# Altium PCB NexieControl rev.2.PcbDoc
Units mm, origin at the board's own origin, x right, y up, seen from the top; angles counter-clockwise.
Board outline 80 x 46 mm, 2 copper layers (Top Layer, Bottom Layer); 119 components, 85 nets, 408 pads, 129 vias.
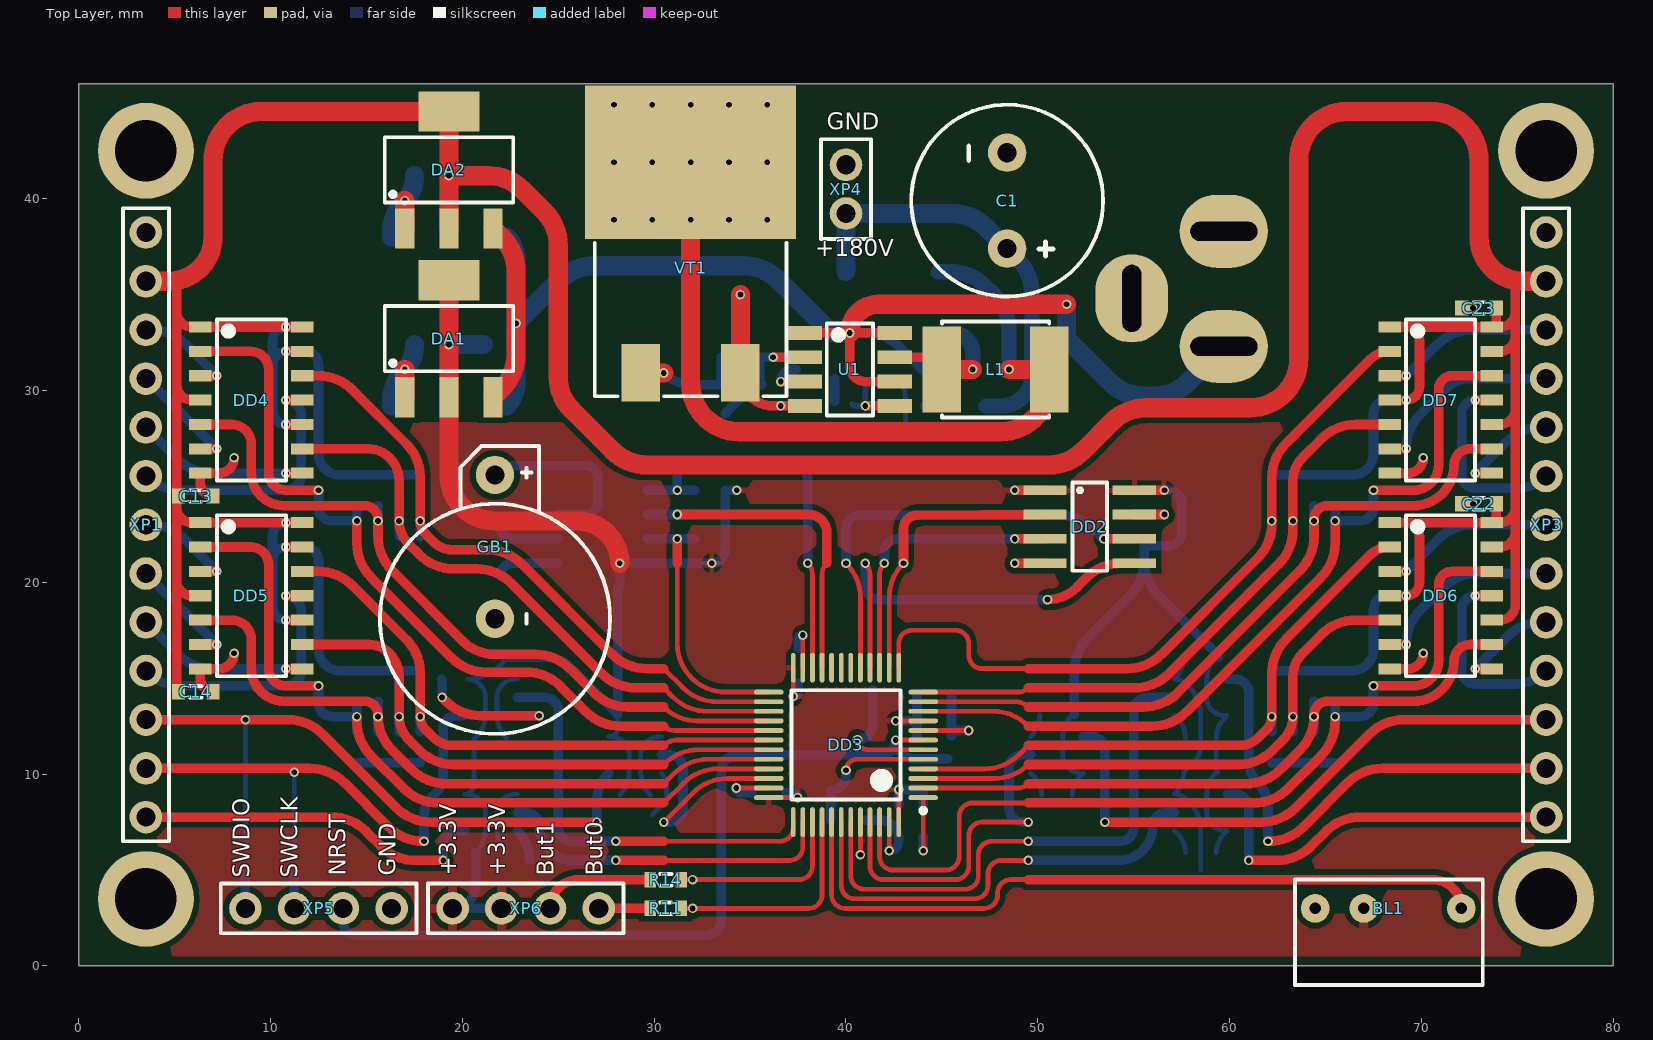
[diagram p0: Top Layer view]
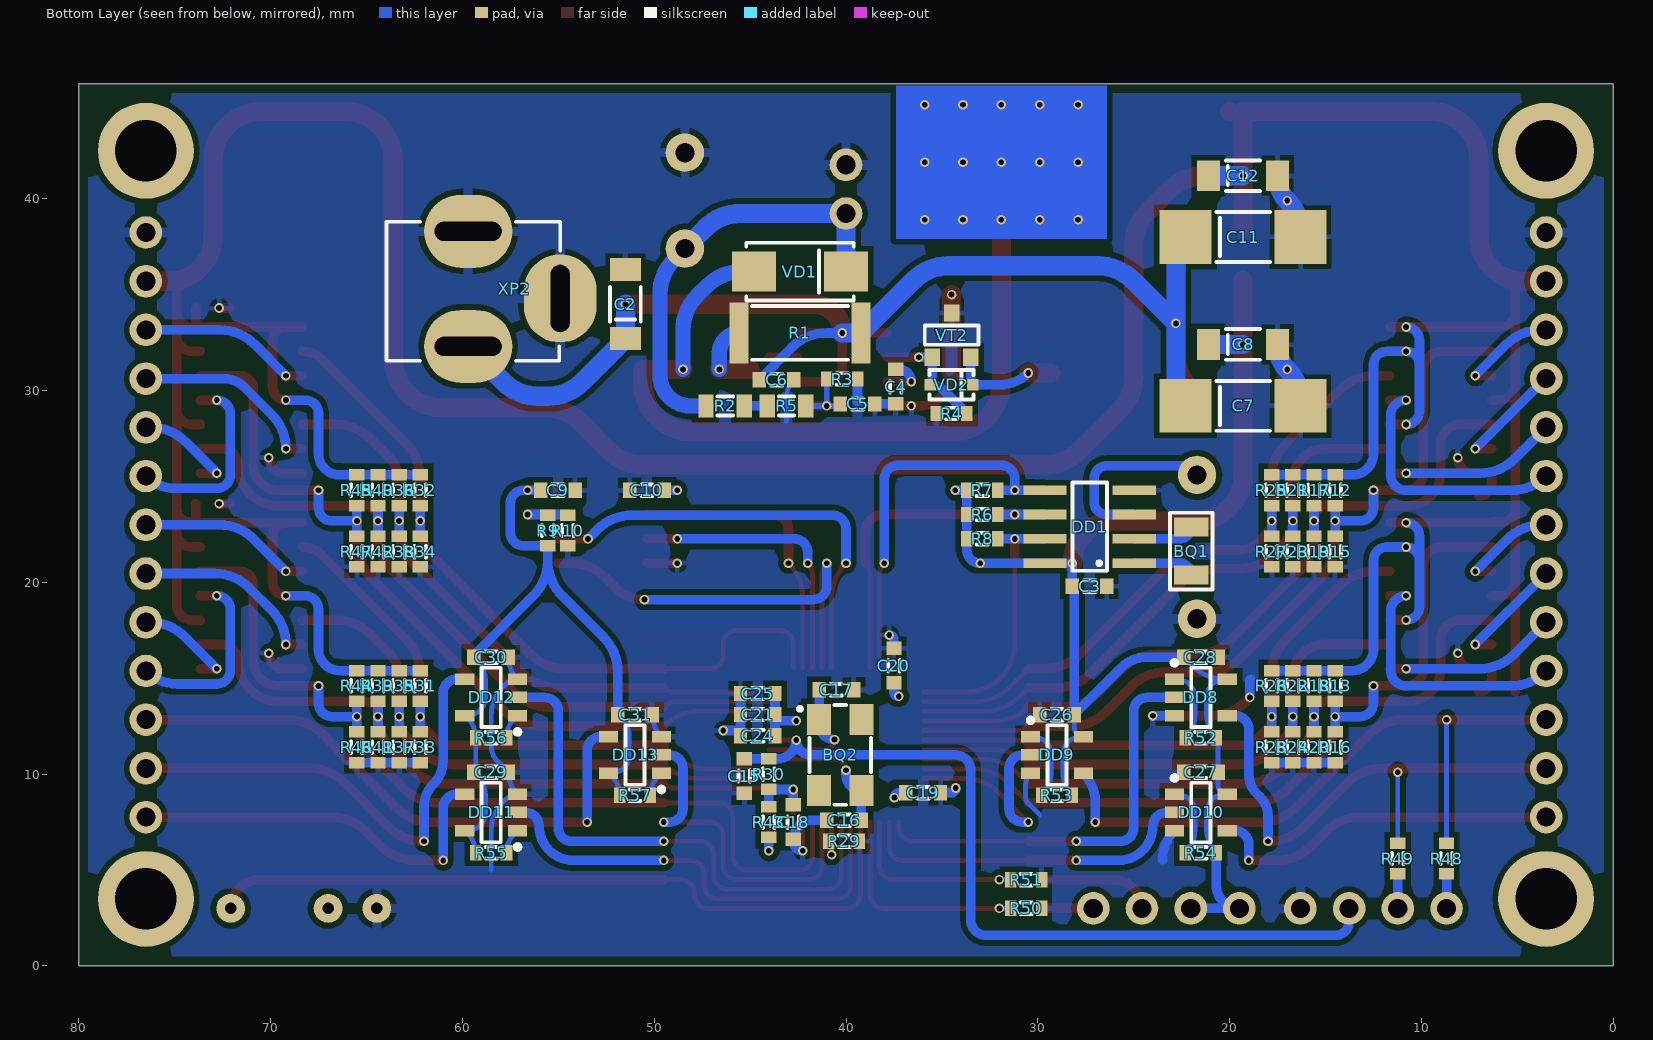
[diagram p1: Bottom Layer view, seen from below]

## Layer stack, top to bottom
Top Solder: solder mask 0.0102, Solder Resist, Dk 3.5
Top Layer: signal copper 0.0356
Dielectric 1: dielectric 0.32, FR-4, Dk 4.8
Bottom Layer: signal copper 0.0356
Bottom Solder: solder mask 0.0102, Solder Resist, Dk 3.5

## Board outline
0,0 0,46 80,46 80,0

## Design rules (kind name [scope] priority, off if disabled: settings)
Clearance Clearance_8 [InNamedPolygon('Bottom Layer-GND')] p1: gap=0.3 ignorepadtopadclearanceinfootprint=FALSE
Clearance Clearance_7 [InNamedPolygon('Bottom Layer-GND')] p2: gap=0.5 ignorepadtopadclearanceinfootprint=FALSE
Clearance Clearance_6 [InNamedPolygon('Bottom Layer-GND')] p3: gap=0.254 ignorepadtopadclearanceinfootprint=FALSE except(0: Arc-Hole Track-Hole SMDPad-Hole THPad-Hole Via-Hole Fill-Hole Poly-Hole Region-Hole Text-Hole)
Clearance Clearance_5 [InNamedPolygon('Bottom Layer-GND')] p4: gap=0.3 ignorepadtopadclearanceinfootprint=FALSE
Clearance Clearance_4 [InNamedPolygon('Bottom Layer-GND')] p5: gap=0.3 ignorepadtopadclearanceinfootprint=FALSE
Clearance Clearance_3 [InNamedPolygon('Bottom Layer-GND')] p6: gap=0 ignorepadtopadclearanceinfootprint=FALSE
Clearance Clearance_2 [InNamedPolygon('Bottom Layer-GND')] p7: gap=0.3 ignorepadtopadclearanceinfootprint=FALSE
Clearance Clearance_1 [InNamedPolygon('Bottom Layer-GND')] p8: gap=0.5 ignorepadtopadclearanceinfootprint=FALSE
Clearance [All] p9: gap=0 ignorepadtopadclearanceinfootprint=FALSE
ComponentClearance [All] p1: gap=0.25 collisioncheckmode=3 verticalgap=0.254 showdistances=FALSE
HoleSize [All] p1: absolutevalues=TRUE maxlimit=3.5 minlimit=0.3 maxpercent=80.000 minpercent=20.000
MinimumSolderMaskSliver [All] p1: minsoldermaskwidth=0.15
PlaneClearance [All] p1: clearance=0.5
PlaneConnect [All] p1: planeconnectstyle=Relief reliefexpansion=0.25 reliefentries=4 reliefconductorwidth=0.25 reliefairgap=0.25
PolygonConnect PolygonConnect_4 [All vs IsNamedPolygon('Bottom Layer-GND')] p1: thpad.connectstyle=Relief thpad.reliefconductorwidth=0.5 thpad.reliefentries=4 thpad.polygonreliefangle="90 Angle" thpad.airgapwidth=0.3 smdpad.connectstyle=Relief smdpad.reliefconductorwidth=0.254 smdpad.reliefentries=4 smdpad.polygonreliefangle="90 Angle" smdpad.airgapwidth=0.254 via.connectstyle=Relief via.reliefconductorwidth=0.254 via.reliefentries=4 via.polygonreliefangle="90 Angle" via.airgapwidth=0.254
PolygonConnect PolygonConnect_3 [All vs IsNamedPolygon('Bottom Layer-GND')] p2: connectstyle=Relief reliefconductorwidth=0.5 reliefentries=4 polygonreliefangle="90 Angle" airgapwidth=0.3
PolygonConnect poly1 [All vs IsNamedPolygon('Bottom Layer-GND')] p3: thpad.connectstyle=Relief thpad.reliefconductorwidth=0.5 thpad.reliefentries=4 thpad.polygonreliefangle="90 Angle" thpad.airgapwidth=0.3 smdpad.connectstyle=Relief smdpad.reliefconductorwidth=0.254 smdpad.reliefentries=4 smdpad.polygonreliefangle="90 Angle" smdpad.airgapwidth=0.254 via.connectstyle=Relief via.reliefconductorwidth=0.254 via.reliefentries=4 via.polygonreliefangle="90 Angle" via.airgapwidth=0.254
PolygonConnect PolygonConnect_2 [All vs IsNamedPolygon('Bottom Layer-GND')] p4: thpad.connectstyle=Relief thpad.reliefconductorwidth=0.5 thpad.reliefentries=4 thpad.polygonreliefangle="90 Angle" thpad.airgapwidth=0.3 smdpad.connectstyle=Relief smdpad.reliefconductorwidth=0.254 smdpad.reliefentries=4 smdpad.polygonreliefangle="90 Angle" smdpad.airgapwidth=0.254 via.connectstyle=Relief via.reliefconductorwidth=0.254 via.reliefentries=4 via.polygonreliefangle="90 Angle" via.airgapwidth=0.254
PolygonConnect PolygonConnect_1 [All vs IsNamedPolygon('Bottom Layer-GND')] p5: thpad.connectstyle=Relief thpad.reliefconductorwidth=0.5 thpad.reliefentries=4 thpad.polygonreliefangle="90 Angle" thpad.airgapwidth=0.5 smdpad.connectstyle=Relief smdpad.reliefconductorwidth=0.254 smdpad.reliefentries=4 smdpad.polygonreliefangle="90 Angle" smdpad.airgapwidth=0.254 via.connectstyle=Relief via.reliefconductorwidth=0.254 via.reliefentries=4 via.polygonreliefangle="90 Angle" via.airgapwidth=0.254
PolygonConnect [All] p6: connectstyle=Relief reliefconductorwidth=0.3 reliefentries=4 polygonreliefangle="90 Angle" airgapwidth=0.5
RoutingVias [All] p1: holewidth=0.3 width=0.8 viastyle="Through Hole" minholewidth=0.3 minwidth=0.5 maxholewidth=3.5 maxwidth=3.5
SolderMaskExpansion [All] p1: expansion=0.1
Width [All] p1: maxlimit=1 minlimit=0.15 preferedwidth=0.25
25 further rules are at their usual default settings.

## Components (designator, comment, footprint, x,y, rotation, side; value= is the part's Value field where it differs from the comment)
BL1 "TSOP31238" TSOP31238 67,3 r0 top
BQ1 "9HT10" 9HT10 22,21.63 r270 bottom
BQ2 "KX-9AT" KX-9A 40.3,11 r270 bottom
C1 "Polar capacitor" K50-35(10x12) 48.4,39.9 r270 top value="10 мк"
C2 "Polar capacitor" Tantal_SMD_A 51.5,34.5 r90 bottom value="100 мк"
C3 "Capacitors" SMD_0603#1 27.3,19.8 r0 bottom value="0.1 мк"
C4 "Capacitors" SMD_0603#1 37.4,30.2 r90 bottom value="510 мк"
C5 "Capacitors" SMD_0603#1 39.4,29.3 r0 bottom value="0.22 мк"
C6 "Capacitors" SMD_0603#1 43.618,30.555 r0 bottom value="0.22 мк"
C7 "Polar capacitor" Tantal_SMD_C 19.3,29.2 r180 bottom value="10 мк"
C8 "Polar capacitor" Tantal_SMD_A 19.3,32.4 r180 bottom value="10 мк"
C9 "Capacitors" SMD_0603#1 55.025,24.805 r0 bottom value="0.1 мк"
C10 "Capacitors" SMD_0603#1 50.375,24.805 r180 bottom value="0.1 мк"
C11 "Polar capacitor" Tantal_SMD_C 19.3,38 r180 bottom value="10 мк"
C12 "Polar capacitor" Tantal_SMD_A 19.3,41.2 r180 bottom value="10 мк"
C13 "Capacitors" SMD_0603#1 6.1,24.5 r180 top value="0.1 мк"
C14 "Capacitors" SMD_0603#1 6.1,14.3 r180 top value="0.1 мк"
C15 "Capacitors" SMD_0603#1 45.3,9.9 r90 bottom value="0.1 мк"
C16 "Capacitors" SMD_0603#1 40.1,7.6 r180 bottom value="22 п"
C17 "Capacitors" SMD_0603#1 40.5,14.4 r0 bottom value="22 п"
C18 "Capacitors" SMD_0603#1 42.75,7.5 r90 bottom value="0.1 мк"
C19 "Capacitors" SMD_0603#1 35.975,9.031 r0 bottom value="0.1 мк"
C20 "Capacitors" SMD_0603#1 37.5,15.657 r270 bottom value="0.1 мк"
C21 "Capacitors" SMD_0603#1 44.6,13.107 r180 bottom value="4.7 мк"
C22 "Capacitors" SMD_0603#1 73,24.1 r0 top value="0.1 мк"
C23 "Capacitors" SMD_0603#1 73,34.3 r0 top value="0.1 мк"
C24 "Capacitors" SMD_0603#1 44.6,12 r180 bottom value="0.01 мк"
C25 "Capacitors" SMD_0603#1 44.6,14.2 r180 bottom value="1 мк"
C26 "Capacitors" SMD_0603#1 29,13.1 r180 bottom value="0.1 мк"
C27 "Capacitors" SMD_0603#1 21.5,10.1 r180 bottom value="0.1 мк"
C28 "Capacitors" SMD_0603#1 21.5,16.1 r0 bottom value="0.1 мк"
C29 "Capacitors" SMD_0603#1 58.5,10.1 r0 bottom value="0.1 мк"
C30 "Capacitors" SMD_0603#1 58.5,16.1 r0 bottom value="0.1 мк"
C31 "Capacitors" SMD_0603#1 51,13.1 r0 bottom value="0.1 мк"
DA1 "LM1117IMP-3.3" S-PQFP-G64 19.3,32.7 r0 top
DA2 "LM1117IMPX-5.0" S-PQFP-G64 19.3,41.5 r0 top
DD1 "M41T81SM6F" Soic-8 27.3,22.9 r0 bottom
DD2 "DS1722S+" Soic-8 52.7,22.9 r0 top
DD3 "STM32F103C8T6" STM-LQFP48L 40,11.525 r180 top
DD4 "74HC125" Soic-14 9,29.5 r0 top locked
DD5 "74HC125" Soic-14 9,19.3 r0 top locked
DD6 "74HC125" Soic-14 71,19.3 r0 top
DD7 "74HC125" Soic-14 71,29.5 r0 top locked
DD8 "SN74AHCT1G125" "SOT 23" 21.5,14 r180 bottom
DD9 "SN74AHCT1G125" "SOT 23" 29,11 r180 bottom
DD10 "SN74AHCT1G125" "SOT 23" 21.5,8 r180 bottom
DD11 "SN74AHCT1G125" "SOT 23" 58.5,8 r0 bottom
DD12 "SN74AHCT1G125" "SOT 23" 58.5,14 r0 bottom
DD13 "SN74AHCT1G125" "SOT 23" 51,11 r0 bottom
GB1 "KLS5-CR1220" KLS5-CR1220-01 21.7,18.1 r90 top
L1 "Inductor" 2220 47.8,31.1 r0 top value="220 мк"
R1 "Resistor" SMD_2512 42.4,33 r0 bottom value=0.22
R2 "Resistor" SMD_0805 46.3,29.195 r0 bottom value=1М
R3 "Resistor" SMD_0603#2 40.2,30.6 r0 bottom value="10 к"
R4 "Resistor" SMD_0603#2 34.495,28.8 r180 bottom value="1 к"
R5 "Resistor" SMD_0805 43.1,29.195 r0 bottom value="390 к"
R6 "Resistor" SMD_0603#2 32.9,23.535 r180 bottom value="4.7 к"
R7 "Resistor" SMD_0603#2 32.9,24.805 r180 bottom value="4.7 к"
R8 "Resistor" SMD_0603#2 32.9,22.265 r180 bottom value="4.7 к"
R9 "Resistor" SMD_0603#2 55.552,22.7 r90 bottom value=0
R10 "Resistor" SMD_0603#2 54.5,22.7 r270 bottom value=0
R11 "Resistor" SMD_0603#2 30.6,3 r0 top value=22
R12 "Resistor" SMD_0603#2 14.5,24.8 r90 bottom value=0
R13 "Resistor" SMD_0603#2 14.5,14.6 r90 bottom value=0
R14 "Resistor" SMD_0603#2 30.6,4.5 r0 top value=22
R15 "Resistor" SMD_0603#2 14.5,21.6 r90 bottom value=0
R16 "Resistor" SMD_0603#2 14.5,11.4 r90 bottom value=0
R17 "Resistor" SMD_0603#2 15.6,24.8 r90 bottom value=0
R18 "Resistor" SMD_0603#2 15.6,14.6 r90 bottom value=0
R19 "Resistor" SMD_0603#2 15.6,21.6 r90 bottom value=0
R20 "Resistor" SMD_0603#2 15.6,11.4 r90 bottom value=0
R21 "Resistor" SMD_0603#2 16.7,24.8 r90 bottom value=0
R22 "Resistor" SMD_0603#2 16.7,14.6 r90 bottom value=0
R23 "Resistor" SMD_0603#2 16.7,21.6 r90 bottom value=0
R24 "Resistor" SMD_0603#2 16.7,11.4 r90 bottom value=0
R25 "Resistor" SMD_0603#2 17.8,24.8 r90 bottom value=0
R26 "Resistor" SMD_0603#2 17.8,14.6 r90 bottom value=0
R27 "Resistor" SMD_0603#2 17.8,21.6 r90 bottom value=0
R28 "Resistor" SMD_0603#2 17.8,11.4 r90 bottom value=0
R29 "Resistor" SMD_0603#2 40.1,6.5 r180 bottom value="10 к"
R30 "Resistor" SMD_0603#2 44.025,10 r90 bottom value="10 к"
R31 "Resistor" SMD_0603#2 62.2,14.6 r90 bottom value=0
R32 "Resistor" SMD_0603#2 62.2,24.8 r90 bottom value=0
R33 "Resistor" SMD_0603#2 62.2,11.4 r90 bottom value=0
R34 "Resistor" SMD_0603#2 62.2,21.6 r90 bottom value=0
R35 "Resistor" SMD_0603#2 63.3,14.6 r90 bottom value=0
R36 "Resistor" SMD_0603#2 63.3,24.8 r90 bottom value=0
R37 "Resistor" SMD_0603#2 63.3,11.4 r90 bottom value=0
R38 "Resistor" SMD_0603#2 63.3,21.6 r90 bottom value=0
R39 "Resistor" SMD_0603#2 64.4,14.6 r90 bottom value=0
R40 "Resistor" SMD_0603#2 64.4,24.8 r90 bottom value=0
R41 "Resistor" SMD_0603#2 64.4,11.4 r90 bottom value=0
R42 "Resistor" SMD_0603#2 64.4,21.6 r90 bottom value=0
R43 "Resistor" SMD_0603#2 44.025,7.5 r270 bottom value=0
R44 "Resistor" SMD_0603#2 65.5,14.6 r90 bottom value=0
R45 "Resistor" SMD_0603#2 65.5,24.8 r90 bottom value=0
R46 "Resistor" SMD_0603#2 65.5,11.4 r90 bottom value=0
R47 "Resistor" SMD_0603#2 65.5,21.6 r90 bottom value=0
R48 "Resistor" SMD_0603#2 8.69,5.6 r90 bottom value=22
R49 "Resistor" SMD_0603#2 11.23,5.6 r90 bottom value=22
R50 "Resistor" SMD_0603#2 30.6,3 r180 bottom value="10 к"
R51 "Resistor" SMD_0603#2 30.6,4.5 r0 bottom value="10 к"
R52 "Resistor" SMD_0603#2 21.5,11.9 r0 bottom value=0
R53 "Resistor" SMD_0603#2 29,8.9 r0 bottom value=0
R54 "Resistor" SMD_0603#2 21.5,5.9 r0 bottom value=0
R55 "Resistor" SMD_0603#2 58.5,5.9 r180 bottom value=0
R56 "Resistor" SMD_0603#2 58.5,11.9 r180 bottom value=0
R57 "Resistor" SMD_0603#2 51,8.9 r180 bottom value=0
U1 "MC34063ABD" SO-8 40.2,31.1 r270 top
VD1 "ES1A" DO_214AC 42.4,36.2 r0 bottom
VD2 "1N4148" SOD-323 34.495,30.3 r180 bottom
VT1 "IRF840" D2_PAK 31.9,37.9 r0 top
VT2 "KT3129" SOT-23 34.495,32.885 r0 bottom
XP1 "DS1021-1*13SF11" DS1021-1*13 3.5,23 r270 top locked
XP2 "Power_jack" DC_Power_Jack 59.7,32.3 r270 bottom
XP3 "DS1021-1*13SF11" DS1021-1*13 76.5,23 r270 top locked
XP4 "DS1021-1*2SF11" DS1021-1*2 40,40.5 r90 top
XP5 "DS1021-1*4SF11" DS1021-1*4 12.5,3 r0 top
XP6 "DS1021-1*4SF11" DS1021-1*4 23.3,3 r180 top

## Footprints (in the part's own frame and the unit in brackets; to place one, negate y for a bottom-side part, rotate by r counter-clockwise, add the part's x,y. Pads: shape width x height; smd on the part's side, far side on the other; paste and mask are expansions set on the pad)
9HT10 [mm]
  rect 1x1.8 smd: 1(-1.25,0) 2(1.25,0)
  silkscreen extent -2,-1.1 2,1.1, body extent -1.6,-0.75 1.6,0.75, height 0.8
2220 [mm]
  rect 2x4.5 smd: 1(-2.8,0) 2(2.8,0)
  silkscreen extent -2.8,-2.5 2.8,2.5, body extent -2.85,-2.5 2.85,2.5, height 4.7
D2_PAK [mm]
  rect 2x3 smd: 1(-2.595,-6.985) 3(2.595,-6.985)
  rect 11x8 smd: 2(0,4)
  silkscreen extent -5,-8.2 5,-0.2, body extent -5,-8.24 5,7.64, height 4.3
DC_Power_Jack [mm]
  oval 3.8x4.6 hole 1 slot 3.5 at 90 deg: 1(0,0) 3(-6,0)
  oval 4.6x3.8 hole 1 slot 3.5 at 0 deg: 2(-2.5,4.8)
  silkscreen extent -6.5,-4.25 0.75,4.8, body extent -13.65,-4.4 0.75,4.9, height 2
DO_214AC [mm]
  rect 2.3x2.1 smd: 1(2.4,0) 2(-2.4,0)
  silkscreen extent -2.8,-1.5 2.8,1.5, body extent -2.8,-1.47 2.8,1.48, height 2.7
DS1021-1*2 [mm]
  round 1.7 hole 1: 1(-1.27,0) 2(1.27,0)
  silkscreen extent -2.6,-1.3 2.6,1.3, body extent -2.54,-1.27 2.54,1.27, height 8.44
DS1021-1*4 [mm]
  round 1.7 hole 1: 1(-3.81,0) 2(-1.27,0) 3(1.27,0) 4(3.81,0)
  silkscreen extent -5.1,-1.3 5.1,1.3, body extent -5.08,-1.27 5.08,1.27, height 8.44
DS1021-1*13 [mm]
  round 1.7 hole 1: 1(-15.24,0) 2(-12.7,0) 3(-10.16,0) 4(-7.62,0) 5(-5.08,0) 6(-2.54,0) 7(0,0) 8(2.54,0) 9(5.08,0) 10(7.62,0) 11(10.16,0) 12(12.7,0) 13(15.24,0)
  silkscreen extent -16.5,-1.2 16.5,1.2, body extent -16.51,-1.27 16.51,1.27, height 8.44
K50-35(10x12) [mm]
  round 2 hole 1: 1(2.5,0) 2(-2.5,0)
  silkscreen extent -5,-5 5,5, body extent -6.1,-6 6,6, height 10.1
KLS5-CR1220-01 [mm]
  round 2 hole 1: 1(7.5,0) 2(0,0)
  silkscreen extent -6,-6 9,6, body extent -7.45,-7.45 8.5,7.45, height 5.8
KX-9A [mm]
  rect 1.6x1.25 smd: 1(-1.85,-1.1) 2(1.85,-1.1) 3(1.85,1.1) 4(-1.85,1.1)
  silkscreen extent -2.6,-2.2 2.6,1.6, body extent -2.5,-1.6 2.5,1.6, height 1.01
S-PQFP-G64 [mm]
  rect 1x2.1 smd: 1(-2.3,-3.05) 2(0,-3.05) 3(2.3,-3.05)
  rect 3.2x2.1 smd: 4(0,3.05)
  silkscreen extent -3.35,-1.7 3.35,1.7, body extent -3.25,-3.48 3.25,3.48, height 1.69
SMD_0603#1 [mm]
  rect 0.7x0.8 smd: 1(-0.9,0) 2(0.9,0)
  silkscreen extent -0.3,-0.3 0.3,0.3, body extent -0.8,-0.4 0.8,0.4, height 0.6
SMD_0603#2 [mm]
  rect 0.6x0.8 smd: 1(-0.8,0) 2(0.8,0)
  silkscreen extent -0.3,-0.3 0.3,0.3, body extent -0.8,-0.4 0.8,0.4, height 0.45
SMD_0805 [mm]
  rect 0.8x1.2 smd: 1(-1,0) 2(1,0)
  silkscreen extent -0.4,-0.5 0.4,0.5, body extent -1,-0.6 1,0.6, height 0.4
SMD_2512 [mm]
  rect 1x3.2 smd: 1(-3.175,0) 2(3.175,0)
  silkscreen extent -2.5,-1.4 2.5,1.4, body extent -3.17,-1.6 3.18,1.6, height 0.55
SO-8 [mm]
  rect 0.72x1.78 smd: 1(-1.905,-2.34) 2(-0.635,-2.34) 3(0.635,-2.34) 4(1.905,-2.34) 5(1.905,2.34) 6(0.635,2.34) 7(-0.635,2.34) 8(-1.905,2.34)
  silkscreen extent -2.4,-1.2 2.4,1.2, body extent -2.42,-3.01 2.43,3.01, height 1.63
SOD-323 [mm]
  rect 0.6x0.6 smd: 1(-1.1,0) 2(1.1,0)
  silkscreen extent -1.14,-0.76 1.14,0.76, body extent -1.15,-0.6 1.15,0.6, height 1.13
Soic-8 [mm]
  rect 2.25x0.5 smd: 1(-2.325,1.905) 2(-2.325,0.635) 3(-2.325,-0.635) 4(-2.325,-1.905) 5(2.325,-1.905) 6(2.325,-0.635) 7(2.325,0.635) 8(2.325,1.905)
  silkscreen extent -0.9,-2.3 0.9,2.3, body extent -3.01,-2.42 3.01,2.43, height 1.63
Soic-14 [mm]
  rect 1.18x0.58 smd: 1(-2.66,3.81) 2(-2.66,2.54) 3(-2.66,1.27) 4(-2.66,0) 5(-2.66,-1.27) 6(-2.66,-2.54) 7(-2.66,-3.81) 8(2.66,-3.81) 9(2.66,-2.54) 10(2.66,-1.27) 11(2.66,0) 12(2.66,1.27) 13(2.66,2.54) 14(2.66,3.81)
  silkscreen extent -1.8,-4.2 1.8,4.2, body extent -2.9,-4.27 2.9,4.28, height 1.75
"SOT 23" [mm] "SOT23, 5-Leads, Body 2,90x2,80mm, Pitch 0,95mm, IPC Medium Density"
  rect 1x0.6 smd: 1(-1.375,0.95) 2(-1.375,0) 3(-1.375,-0.95) 4(1.375,-0.95) 5(1.375,0.95)
  silkscreen extent -1.5,-1.55 0.5,1.92, body extent -1.4,-1.45 1.4,1.45, height 1.45
SOT-23 [mm]
  rect 0.8x0.9 smd: 1(0,-1.15) 2(1,1.15) 3(-1,1.15)
  silkscreen extent -1.4,-0.5 1.4,0.5, body extent -1.46,-1.17 1.46,1.17, height 1
STM-LQFP48L [mm]
  oval 1.55x0.25 smd: 1(-4.025,2.75) 2(-4.025,2.25) 3(-4.025,1.75) 4(-4.025,1.25) 5(-4.025,0.75) 6(-4.025,0.25) 7(-4.025,-0.25) 8(-4.025,-0.75) 9(-4.025,-1.25) 10(-4.025,-1.75) 11(-4.025,-2.25) 12(-4.025,-2.75) 25(4.025,-2.75) 26(4.025,-2.25) 27(4.025,-1.75) 28(4.025,-1.25) 29(4.025,-0.75) 30(4.025,-0.25) 31(4.025,0.25) 32(4.025,0.75) 33(4.025,1.25) 34(4.025,1.75) 35(4.025,2.25) 36(4.025,2.75)
  oval 0.25x1.55 smd: 13(-2.75,-4.025) 14(-2.25,-4.025) 15(-1.75,-4.025) 16(-1.25,-4.025) 17(-0.75,-4.025) 18(-0.25,-4.025) 19(0.25,-4.025) 20(0.75,-4.025) 21(1.25,-4.025) 22(1.75,-4.025) 23(2.25,-4.025) 24(2.75,-4.025) 37(2.75,4.025) 38(2.25,4.025) 39(1.75,4.025) 40(1.25,4.025) 41(0.75,4.025) 42(0.25,4.025) 43(-0.25,4.025) 44(-0.75,4.025) 45(-1.25,4.025) 46(-1.75,4.025) 47(-2.25,4.025) 48(-2.75,4.025)
  silkscreen extent -4.15,-2.85 2.85,3.55, body extent -4.5,-4.5 4.5,4.5, height 1.6
Tantal_SMD_A [mm]
  rect 1.2x1.6 smd: 1(-1.8,0) 2(1.8,0)
  silkscreen extent -0.9,-0.8 0.9,0.8, body extent -1.6,-0.8 1.6,0.8, height 1.62
Tantal_SMD_C [mm]
  rect 2.7x2.8 smd: 1(-3,0) 2(3,0)
  silkscreen extent -1.4,-1.3 1.4,1.3, body extent -3,-1.6 3,1.6, height 2.52
TSOP31238 [mm]
  round 1.5 hole 0.6: 1(-2.54,0) 2(0,0) 3(5.08,0)
  silkscreen extent -3.6,-4 6.2,1.5, body extent -3.73,-4.2 6.27,1.6, height 13

## Part data
BL1: "TSOP31238 (TSOP1738), ИК-приемник 38кГц", Manufacturer=Vishay, Class="IR Receiver", Creator=FedorenkoSS, ESKD=TSOP31238
BQ1: "CRYSTAL, 32.768KHZ, 12.5PF, 3.2 X 1.5MM;; CRYSTAL, 32.768KHZ, 12.5PF, 3.2 X 1.5MM; Frequency Nom:32.768kHz; Crystal Case:SMD, 3.2mm x 1.5mm; Frequency Stability + / -:-; Load Capacitance:12.5pF; Frequency Tolerance + / -:20ppm; Product Range:9HT10 Series; Frequency:32.768kHz", Frequency="32.768 кГц", Manufacturer="TXC Corporation", Creator=FedorenkoSS, ESKD=9HT10-32.768KDZF-T, Type=9HT10
BQ2: Frequency="8 МГц", Manufacturer="Geyer Electronic", Creator=PavelR, ESKD="KX-9AT (12.89048)", Type=KX-9AT
C2: Manufacturer=Vishay, Creator=PavelR, ESKD=293D107X9020D2TE3
DA1: library part LM1117IMP-3.3/NOPB, "Стабилизатор напряжения LowDrop, +3.3В, 0.8А [SOT-223]", Manufacturer="Texas Instruments", Package=SOT-223, Class=LDO, Creator=FedorenkoS, ESKD=LM1117IMP-3.3/NOPB
DA2: "Линейный регулятор с низким падением напряжения, 5В, 1.2А, [SOT-223]", Manufacturer="Texas Instruments", Package=SOT-223, Class=LDO, Creator=FedorenkoS, ESKD=LM1117IMPX-5.0/NOPB
DD1: "Часы реального времени, формат (дата/месяц/год сс:мм:чч), I2C, 2.7В...5.5В, [SOIC-8]", Manufacturer="ST Microelectronics", Class=RTC, Creator=FedorenkoSS, ESKD=M41T81SM6F
DD2: "DS1722 / Digital Thermometer with / SPI/3-Wire Interface", Manufacturer=Dallas_Semiconductor, Class="DIGITAL THERMOMETER", Creator=FedorenkoSS, ESKD=DS1722S+
DD3: Manufacturer=STMicroelectronix, Package=LQFP48L, Class=Microcontroller, ESKD=MC-ARM-STM32F103X8_B-SQ48
DD4 DD5 DD6 DD7: "74HC125D.653, Буферы и линейные аппаратные драйверы QUAD 3-STATE BUS BUF [SO-14]", Manufacturer="NXP Semiconductor", Class=Buffer, Creator=FedorenkoSS, ESKD=74HC125D.653
DD8 DD9 DD10 DD11 DD12 DD13: Manufacturer="Texas Instruments", Package=SOT-23, Class=BUF, ESKD=SN74AHCT1G125DBVR
GB1: "KLS5-CR1220-01 (FC1-5010), Батарейный отсек 1xCR1220", Manufacturer="KLS electronic co ltd", Class=Battery, Creator=FedorenkoSS, ESKD=L-KLS5-CR1220-01
R1: Manufacturer=Yageo, Creator=PavelR, ESKD=RL2512JK-070R22L
U1: Manufacturer="ST Microelectronics", Class=DC-DC, ESKD=MC34063ABD-TR
VD1: "ES1J, Диод быстродействующий 1А 600В 35нс [SMA / DO-214AC]", Manufacturer="DC COMPONENTS CO., LTD.", Package=DO-214AC, Class=Diode, Creator=FedorenkoSS, ESKD=ES1A
VD2: Manufacturer=Vishay, Package=SOD-323, Class=Diode, Creator=FedorenkoSS, ESKD=1N4148WS
VT1: library part IRF840ASPBF, "Транзистор, N-канал 500В 8.0А", Manufacturer=Vishay, Class=Transistor, Creator=FedorenkoS, ESKD=IRF840ASPBF
VT2: Manufacturer=Россия, Analog=ВС857А, Class=Transistors, Creator=FedorenkoS, ESKD=КТ3129Б9
XP1 XP3 XP4 XP5 XP6: "PLS", Производитель=Connfly, Разработчик библиотеки="Федоренко С.С."
  XP1 XP3: ЕСКД=DS1021-1*13SF11
  XP4: ЕСКД=DS1021-1*2SF11
  XP5 XP6: ЕСКД=DS1021-1*4SF11
C1: Creator=PavelR, ESKD=RD2E106M1012M
C3 C4 C5 C6 C7 C8 C9 C10 C11 C12 C13 C14 C15 C16 C17 C18 C19 C20 C21 C22 C23 C24 C25 C26 C27 C28 C29 C30 C31 R2 R3 R4 R5 R6 R7 R8 R9 R10 R11 R12 R13 R14 R15 R16 R17 R18 R19 R20 R21 R22 R23 R24 R25 R26 R27 R28 R29 R30 R31 R32 R33 R34 R35 R36 R37 R38 R39 R40 R41 R42 R43 R44 R45 R46 R47 R48 R49 R50 R51 R52 R53 R54 R55 R56 R57: Creator=PavelR
L1: Creater=FedorenkoS, ESKD=LQH55DN221M

## Free pads (board coordinates)
  round 5 hole 3.2: 0(3.5,3.5) 0(3.5,42.5) 0(76.5,3.5) 0(76.5,42.5)

## Via types
v1: diameter 0.5, hole 0.3, Top Layer to Bottom Layer, 129 vias

## Nets (pads, with @x,y where several pads share a name; then routed paths per layer and width w, separated by ;. In a path a pad name is that pad's centre, name@x,y a point inside that pad or via, vN(x,y) a via of type N, cw(c..) or ccw(c..) an arc to the next point about the centre after c; other vN are vias at no path point)
+3.3: BL1.2 C3.2 C8.1 C9.2 C10.2 C18.2 C19.2 C20.2 C21.2 C24.2 C25.2 C26.2 C27.2 C28.2 C29.2 C30.2 C31.2 DA1.2 DA1.4 DD1.8 DD2.1 DD2.8 DD3.9 DD3.24 DD3.36 DD3.48 DD8.5 DD9.5 DD10.5 DD11.5 DD12.5 DD13.5 R6.1 R7.1 R8.1 R9.1 R30.1 R43.1 R52.1 R53.1 R54.1 R55.1 R56.1 R57.1 XP6.3 XP6.4 | length 130.3
  Top Layer w0.25: DD3.36 v1(37.475,8.775) ; v1(37.25,14.05) DD3.24 ; v1(42.6,12.775) DD3.9 ; DD3.48 v1(42.75,9.2)
  Top Layer w0.5: v1(48.8,24.805) DD2.1 ; DD2.8 v1(56.6,24.805)
  Top Layer w1: DA1.4 DA1.2 19.3,25.6 ccw(c21.7,25.6) 21.7,23.2 25.995,23.2 cw(c25.995,20.995) v1(28.2,20.995)
  Bottom Layer w0.25: R54.1 ccw(c19.493,7.107) 21.2,7.107 21.2,8 ccw(c20.25,8) 20.25,8.95 DD10.5 ccw(c20.125,9.425) 20.6,9.425 C27.2 20.6,11.8 cw(c20.7,11.8) R52.1 ccw(c19.493,13.107) 21.2,13.107 21.2,14 ccw(c20.25,14) 20.25,14.95 ccw(c20.25,17.364) 21.957,15.657 C28.2 ; C26.2 28.1,12.425 cw(c27.625,12.425) DD9.5 27.75,11.95 cw(c27.75,11) 28.7,11 28.7,10.107 cw(c26.993,10.107) R53.1 ; R57.1 cw(c53.188,8.9) 52.207,9.882 DD13.5 52.25,10.05 cw(c52.25,11) 51.3,11 51.3,11.893 cw(c53.007,11.893) C31.2@51.8,13.1 ; R55.1 cw(c60.688,5.9) 59.707,6.882 DD11.5 59.75,7.05 cw(c59.75,8) 58.8,8 58.8,8.893 cw(c60.507,8.893) C29.2@59.3,10.1 ; C30.2@59.3,16.1 ccw(c60.507,14.893) 58.8,14.893 58.8,14 ccw(c59.75,14) 59.75,13.05 DD12.5 59.707,12.882 ccw(c60.688,11.9) R56.1 59.3,10.2 ccw(c59.4,10.2) C29.2
  Bottom Layer w0.5: R54.1 20.7,4.21 cw(c19.49,4.21) XP6.4 XP6.3 ; C28.2 24.331,16.1 cw(c24.331,14.243) 25.644,15.556 C26.2 28.1,19.559 cw(c28.441,19.559) C3.2 v1(28.2,20.995) v1(33,20.995) ccw(c33,21.695) 33.7,21.695 R8.1 R6.1 R7.1 34.295,24.805 v1(34.3,24.8) ; C19.2 37.219,9.031 cw(c37.219,8.775) v1(37.475,8.775) ; v1(37.25,14.05) ccw(c37.25,14.3) 37.5,14.3 C20.2 ; v1(42.6,12.775) C21.2@43.7,12.775 ; C18.2 v1(42.75,9.2) R30.1 R43.1 ; C24.2 C21.2@43.7,12.775 ; C25.2 C21.2 C21.2@43.7,12.775 ; v1(48.8,24.805) C10.2 ; C31.2 51.9,15.344 cw(c54.44,15.344) 52.644,17.14 54.808,19.304 ccw(c53.012,21.1) 55.552,21.1 ; C9.2 v1(56.6,24.805) 56.8,24.805 cw(c56.8,24.105) 57.5,24.105 57.5,22.6 cw(c56.8,22.6) 56.8,21.9 R9.1 55.552,21.1 ; C30.2 ccw(c59.159,16.1) 59.329,16.271 56.296,19.304 cw(c58.092,21.1) 55.552,21.1
  Bottom Layer w1: v1(19.3,32.4) C8.1
+5: C12.1 C13.2 C14.2 C22.2 C23.2 DA2.2 DA2.4 DD4.1 DD4.4 DD4.10 DD4.13 DD4.14 DD5.1 DD5.4 DD5.10 DD5.13 DD5.14 DD6.1 DD6.4 DD6.10 DD6.13 DD6.14 DD7.1 DD7.4 DD7.10 DD7.13 DD7.14 R12.2 R13.2 R17.2 R18.2 R21.2 R22.2 R25.2 R26.2 R31.2 R32.2 R35.2 R36.2 R39.2 R40.2 R44.2 R45.2 XP1.2 XP3.2 | length 272.6
  Top Layer w0.5: 5.037,35.725 cw(c5.037,35.662) 5.1,35.662 5.1,34.12 ; C14.2@5.1,14.3 5.1,20.11 ; DD5.1@5.91,23.15 DD5.1@6.34,23.15 ; DD5.4 5.91,19.3 cw(c5.91,20.11) 5.1,20.11 ; DD4.4 5.91,29.5 cw(c5.91,30.31) 5.1,30.31 ; v1(10.8,18.03) DD5.10 ; v1(10.8,21.84) DD5.13 ; v1(10.8,28.23) DD4.10 ; v1(10.8,32.04) DD4.13 ; DD5.14 v1(10.8,23.11) DD5.1 5.91,23.11 cw(c5.91,23.92) 5.1,23.92 ; DD4.14 v1(10.8,33.31) DD4.1 5.91,33.31 cw(c5.91,34.12) 5.1,34.12 ; DD6.4 v1(69.2,19.3) ccw(c69.2,20) 69.9,20 69.9,22.41 ccw(c69.2,22.41) 69.2,23.11 ; DD6.1 DD6.14 ; DD7.4 v1(69.2,29.5) ccw(c69.2,30.2) 69.9,30.2 69.9,32.61 ccw(c69.2,32.61) 69.2,33.31 ; DD7.1 DD7.14 ; DD6.10 74.09,18.03 ccw(c74.09,18.84) 74.9,18.84 74.9,35.662 ; DD6.13 74.09,21.84 ccw(c74.09,22.65) 74.9,22.65 ; DD7.10 74.09,28.23 ccw(c74.09,29.04) 74.9,29.04 ; DD7.13 74.09,32.04 ccw(c74.09,32.85) 74.9,32.85 ; C22.2 73.9,23.35 cw(c73.66,23.35) DD6.14 ; C23.2 73.9,33.55 cw(c73.66,33.55) DD7.14 ; 74.9,23.92 cw(c74.09,23.92) 74.09,23.11 DD6.14 ; 74.9,34.12 cw(c74.09,34.12) 74.09,33.31 DD7.14 ; 5.1,20.11 5.1,23.92 ; 5.1,23.92 5.1,30.31 ; 5.1,30.31 5.1,34.12
  Top Layer w1: XP1.2 4.7,35.7 ; 5.037,35.725 ccw(c4.7,38) 7,38 7,42.01 cw(c9.54,42.01) 9.54,44.55 DA2.4 v1(19.3,41.2) ; DA2.2 v1(19.3,41.2) ; XP3.2 75.3,35.7 cw(c75.3,38) 73,38 73,42.01 ccw(c70.46,42.01) 70.46,44.55 66.14,44.55 ccw(c66.14,42.01) 63.6,42.01 63.6,31.64 cw(c61.06,31.64) 61.06,29.1 55.652,29.1 ccw(c55.652,26.56) 53.856,28.356 52.364,26.864 cw(c50.568,28.66) 50.568,26.12 32.3,26.12 29.632,26.12 cw(c29.632,28.66) 27.836,26.864 25.7,29 cw(c27.39,30.69) 25,30.69 25,37.548 ccw(c22.46,37.548) 24.256,39.344 23.144,40.456 ccw(c21.348,38.66) 21.348,41.2 v1(19.3,41.2)
  Bottom Layer w0.5: v1(10.8,18.03) cw(c10.8,18.73) 10.1,18.73 10.1,21.14 ; v1(10.8,23.11) ccw(c10.8,22.41) 10.1,22.41 10.1,21.14 ; v1(10.8,28.23) cw(c10.8,28.93) 10.1,28.93 10.1,31.34 ; v1(10.8,33.31) ccw(c10.8,32.61) 10.1,32.61 10.1,31.34 ; R26.2 R22.2 R13.2 13.6,15.4 cw(c13.6,16.5) 12.5,16.5 12.5,21.14 ccw(c11.8,21.14) 11.8,21.84 v1(10.8,21.84) ccw(c10.8,21.14) 10.1,21.14 ; R25.2 R12.2 13.6,25.6 cw(c13.6,26.7) 12.5,26.7 12.5,31.34 ccw(c11.8,31.34) 11.8,32.04 v1(10.8,32.04) ccw(c10.8,31.34) 10.1,31.34 ; R31.2 R39.2 66.4,15.4 ccw(c66.4,16.5) 67.5,16.5 67.5,18.6 cw(c68.2,18.6) 68.2,19.3 v1(69.2,19.3) ; R32.2 R40.2 R45.2 66.4,25.6 ccw(c66.4,26.7) 67.5,26.7 67.5,28.8 cw(c68.2,28.8) 68.2,29.5 v1(69.2,29.5)
  Bottom Layer w1: v1(19.3,41.2) C12.1
+12: C2.1 C6.2 C7.1 C11.1 DA1.3 DA2.3 R1.1 U1.1 U1.6 U1.8 XP2.1 | length 77.2
  Top Layer w0.5: U1.1 40.2,33.005 U1.8 U1.8@42.5,33.045 ; v1(40.2,33) 40.2,31.3 ccw(c41.035,31.3) 41.035,30.465 U1.6
  Top Layer w1: DA1.3 22.056,30.106 ccw(c20.26,31.902) 22.8,31.902 v1(22.8,33.5) 22.8,36.198 ccw(c20.26,36.198) 22.056,37.994 DA2.3 ; v1(40.2,33) cw(c41.7,33) 40.2,33.005 cw(c41.7,33) 41.7,34.5 v1(51.5,34.5)
  Bottom Layer w0.5: v1(40.2,33) 41.021,33 cw(c41.021,30.46) 42.817,32.256 C6.2
  Bottom Layer w1: C7.1 ccw(c21.093,30.407) 22.8,30.407 v1(22.8,33.5) ; C11.1 cw(c21.093,36.793) 22.8,36.793 v1(22.8,33.5) ; v1(40.2,33) R1.1 36.469,35.756 ccw(c34.673,33.96) 34.673,36.5 26.852,36.5 ccw(c26.852,33.96) 25.056,35.756 v1(22.8,33.5) ; v1(51.5,34.5) C2.1 53.756,30.444 ccw(c55.552,32.24) 55.552,29.7 56.048,29.7 ccw(c56.048,32.24) 57.844,30.444 XP2.1
+180: C1.1 R2.2 VD1.2 XP4.1 | length 22.4
  Bottom Layer w0.8: R2.2 48.095,29.195 ccw(c48.095,30.8) 49.7,30.8 49.7,35.048 ccw(c47.16,35.048) 48.956,36.844 C1.1
  Bottom Layer w1: VD1.2 XP4.1 45.518,39.23 cw(c45.518,36.69) 47.314,38.486 C1.1
BOOT0: DD3.44 R29.1 | length 2.5
  Top Layer w0.25: v1(40.75,5.8) DD3.44
  Bottom Layer w0.25: v1(40.75,5.8) 40.75,6.35 cw(c40.9,6.35) R29.1
But_0: DD3.40 R11.2 R50.1 | length 12.1
  Top Layer w0.25: R11.2 v1(32,3) 38.05,3 ccw(c38.05,3.7) 38.75,3.7 DD3.40
  Bottom Layer w0.25: R50.1 v1(32,3)
But_1: DD3.39 R14.2 R51.2 | length 10.1
  Top Layer w0.25: R14.2 v1(32,4.5) 37.55,4.5 ccw(c37.55,5.2) 38.25,5.2 DD3.39
  Bottom Layer w0.25: R51.2 v1(32,4.5)
DT_CE: DD2.2 DD3.14 | length 15.2
  Top Layer w0.25: DD3.14 42.25,19.198 cw(c44.79,19.198) 42.994,20.994 v1(43,21)
  Top Layer w0.5: v1(43,21) 43,22.8 cw(c43.7,22.8) 43.7,23.5 DD2.2
DT_MISO: DD2.5 DD3.16 | length 21.7
  Top Layer w0.25: v1(41,20.995) cw(c40.396,20.391) 41.25,20.391 DD3.16
  Top Layer w0.5: v1(50.503,19.1) ccw(c50.503,21.251) 52.024,19.73 52.545,20.251 cw(c54.341,18.455) 54.341,20.995 DD2.5
  Bottom Layer w0.5: v1(41,20.995) 41,19.8 ccw(c41.7,19.8) 41.7,19.1 v1(50.503,19.1)
DT_MOSI: DD2.6 DD3.17 | length 23.3
  Top Layer w0.25: v1(40,20.995) 40.006,20.989 cw(c38.21,19.193) 40.75,19.193 DD3.17
  Top Layer w0.5: v1(53.45,22.265) DD2.6
  Bottom Layer w0.5: v1(40,20.995) 40,22 40,22.8 cw(c40.7,22.8) 40.7,23.5 51.163,23.5 cw(c51.163,20.96) 52.959,22.756 v1(53.45,22.265)
DT_SCLK: DD2.3 DD3.15 | length 14.9
  Top Layer w0.25: DD3.15 41.75,20.391 cw(c42.604,20.391) v1(42,20.995)
  Top Layer w0.5: v1(48.8,22.265) DD2.3
  Bottom Layer w0.5: v1(42,20.995) 42,21.565 cw(c42.7,21.565) 42.7,22.265 v1(48.8,22.265)
GND: BL1.1 C1.2 C2.2 C3.1 C4.1 C5.1 C6.1 C7.2 C8.2 C9.1 C10.1 C11.2 C12.2 C13.1 C14.1 C15.1 C16.1 C17.1 C18.1 C19.1 C20.1 C21.1 C22.1 C23.1 C24.1 C25.1 C26.1 C27.1 C28.1 C29.1 C30.1 C31.1 DA1.1 DA2.1 DD1.4 DD2.4 DD3.8 DD3.23 DD3.35 DD3.47 DD4.7 DD5.7 DD6.7 DD7.7 DD8.3 DD9.3 DD10.3 DD11.3 DD12.3 DD13.3 GB1.2 R3.1 R4.1 R10.2 R15.1 R16.1 R19.1 R20.1 R23.1 R24.1 R27.1 R28.1 R29.2 R33.1 R34.1 R37.1 R38.1 R41.1 R42.1 R46.1 R47.1 R50.2 R51.1 U1.4 VT1.3 VT2.1 XP1.1 XP2.2 XP2.3 XP3.1 XP4.2 XP5.4 | length 85.5
  Top Layer w0.25: v1(34.275,9.275) DD3.35 ; DD3.23 v1(37.75,17.25) ; v1(42.25,6) DD3.47 ; DD3.8 v1(46.4,12.275)
  Top Layer w0.5: C14.1 cw(c7,14.96) 6.34,14.96 DD5.7 7.29,15.49 ccw(c7.29,16.3) v1(8.1,16.3) ; C13.1 cw(c7,25.16) 6.34,25.16 DD4.7 7.29,25.69 ccw(c7.29,26.5) v1(8.1,26.5) ; v1(18.94,14) 19.146,13.794 ccw(c20.943,15.59) 20.943,13.05 v1(24,13.05) ; VT1.3 ccw(c36.215,30.915) 36.215,29.195 v1(36.6,29.195) U1.4 ; v1(48.8,20.995) DD2.4 ; DD6.7 69.29,15.49 ccw(c69.29,16.3) v1(70.1,16.3) ; DD7.7 69.29,25.69 ccw(c69.29,26.5) v1(70.1,26.5) ; C22.1 v1(72.682,24.1) ; C23.1 v1(72.682,34.3)
  Top Layer w1: DA1.1 v1(17,31.1) ; DA2.1 v1(17,39.9) ; VT1.3 v1(34.495,35)
  Bottom Layer w0.25: 29.9,7.874 30.507,8.481 ccw(c30.188,8.8) 30.639,8.8 30.639,9.412 ccw(c29.737,9.412) DD9.3 ; C6.1 cw(c41.794,29.632) 43.1,29.632 43.1,28.4 ; DD13.3 ccw(c48.478,13.097) 50.1,13.097 C31.1 ; C30.1 57.6,16.097 cw(c55.978,16.097) DD12.3 cw(c57.125,14.1) 57.726,14.701 57.9,14.527 cw(c56.451,13.078) 58.5,13.078 58.5,11.466 cw(c57.366,11.466) 58.168,10.665 57.6,10.097 cw(c55.978,10.097) DD11.3 cw(c57.125,8.1) 57.726,8.701 57.9,8.527 cw(c56.451,7.078) 58.5,7.078 58.5,5
  Bottom Layer w0.5: R16.1 R20.1 R24.1 R28.1 ; 18.91,14.95 cw(c18.837,14.877) 18.94,14.877 v1(18.94,14) ; DD10.3 cw(c21.366,5.541) 23.5,5.541 ; DD8.3 v1(24,13.05) ; v1(34.275,9.275) ccw(c34.519,9.275) 34.519,9.031 C19.1 ; C4.1 C5.1 ; C20.1 37.5,17 cw(c37.75,17) v1(37.75,17.25) ; 39.4,29.434 R3.1 ; C16.1 41.75,7.6 cw(c41.75,6.6) C18.1 42.75,6.5 cw(c42.25,6.5) v1(42.25,6) ; C24.1 C24.1@45.5,12.275 ; C25.1 C21.1 C24.1@45.5,12.275 ; v1(46.4,12.275) C24.1@45.5,12.275 ; R33.1 R37.1 R41.1 R46.1
  Bottom Layer w1: C7.2 16.3,29.41 cw(c18.69,29.41) v1(17,31.1) ccw(c15.793,32.307) 17.5,32.307 C8.2 ; C11.2 16.3,38.21 cw(c18.69,38.21) v1(17,39.9) ccw(c15.793,41.107) 17.5,41.107 C12.2
IR_out: BL1.3 DD3.41 | length 38.8
  Top Layer w0.25: DD3.41 39.25,3.7 ccw(c39.95,3.7) 39.95,3 47.2,3 ccw(c47.2,3.7) 47.9,3.7 47.9,3.8 cw(c48.6,3.8) 48.6,4.5 49.5,4.5
  Top Layer w0.5: 49.5,4.5 70.58,4.5 cw(c70.58,3) BL1.3
LED_B: DD10.4 XP1.13 | length 18.6
  Top Layer w0.5: XP1.13 13.188,7.76 cw(c13.188,5.22) 14.984,7.016 15.756,6.244 ccw(c17.552,8.04) 17.552,5.5 v1(19,5.5)
  Bottom Layer w0.5: v1(19,5.5) 19,6.35 cw(c19.7,6.35) 19.7,7.05 DD10.4
LED_B_mcu: DD3.38 DD10.2 | length 18
  Top Layer w0.25: 30.5,5.5 37.05,5.5 ccw(c37.05,6.2) 37.75,6.2 DD3.38
  Top Layer w0.5: v1(28,5.5) 30.5,5.5
  Bottom Layer w0.5: DD10.2 23.3,8 cw(c23.3,7.3) 24,7.3 ccw(c25.8,7.3) 25.8,5.5 v1(28,5.5)
LED_G: DD8.4 R49.2 XP1.12 | length 27.2
  Top Layer w0.5: XP1.12 12.048,10.3 cw(c12.048,7.76) 13.844,9.556 16.156,7.244 ccw(c17.952,9.04) v1@17.952,6.5
  Bottom Layer w0.25: R49.2 v1(11.23,10.1)
  Bottom Layer w0.5: v1(18,6.5) 18,7.834 cw(c19.366,7.834) 18.4,8.8 18.576,8.976 ccw(c17.551,10) 19,10 19,12.35 cw(c19.7,12.35) 19.7,13.05 DD8.4
LED_G_mcu: DD3.37 DD8.2 | length 22
  Top Layer w0.25: 30.5,6.5 36.55,6.5 ccw(c36.55,7.2) 37.25,7.2 DD3.37
  Top Layer w0.5: v1(28,6.5) 30.5,6.5
  Bottom Layer w0.5: DD8.2 24.3,14 cw(c24.3,13.3) 25,13.3 25,7.2 ccw(c25.7,7.2) 25.7,6.5 v1(28,6.5)
LED_P_B: DD13.4 XP3.11 | length 30.3
  Top Layer w0.5: v1(53.5,7.5) 61.648,7.5 ccw(c61.648,10.04) 63.444,8.244 67.296,12.096 cw(c69.092,10.3) 69.092,12.84 XP3.11
  Bottom Layer w0.5: DD13.4 52.8,11.95 cw(c52.8,11.25) 53.5,11.25 v1(53.5,7.5)
LED_P_B_mcu: DD3.45 DD13.2 | length 18.4
  Top Layer w0.25: DD3.45 41.25,5.2 ccw(c41.95,5.2) 41.95,4.5 45.7,4.5 ccw(c45.7,5.2) 46.4,5.2 46.4,6.8 cw(c47.1,6.8) 47.1,7.5 v1(49.5,7.5)
  Bottom Layer w0.5: v1(49.5,7.5) 49.2,7.5 cw(c49.2,8.2) 48.5,8.2 48.5,10.3 cw(c49.2,10.3) 49.2,11 DD13.2
LED_P_G: DD12.4 XP3.12 | length 25.3
  Top Layer w0.5: v1@62.048,6.5 ccw(c62.048,9.04) 63.844,7.244 66.156,9.556 cw(c67.952,7.76) 67.952,10.3 XP3.12
  Bottom Layer w0.5: DD12.4 60.3,14.95 cw(c60.3,14.25) 61,14.25 61,10.707 ccw(c62.707,10.707) 61.5,9.5 cw(c60.293,8.293) 62,8.293 v1(62,6.5)
LED_P_G_mcu: DD3.43 DD12.2 | length 28.9
  Top Layer w0.25: DD3.43 40.25,4.7 ccw(c40.95,4.7) 40.95,4 46.2,4 ccw(c46.2,4.7) 46.9,4.7 46.9,5.8 cw(c47.6,5.8) 47.6,6.5 v1(49.5,6.5)
  Bottom Layer w0.5: v1(49.5,6.5) 54.3,6.5 ccw(c54.3,7.2) 55,7.2 55,13.3 cw(c55.7,13.3) 55.7,14 DD12.2
LED_P_R: DD11.4 XP3.13 | length 20.5
  Top Layer w0.5: v1(61,5.5) 62.448,5.5 ccw(c62.448,8.04) 64.244,6.244 65.016,7.016 cw(c66.812,5.22) 66.812,7.76 XP3.13
  Bottom Layer w0.5: DD11.4 60.3,8.95 cw(c60.3,8.25) 61,8.25 v1(61,5.5)
LED_P_R_mcu: DD3.42 DD11.2 | length 23.9
  Top Layer w0.25: DD3.42 39.75,4.2 ccw(c40.45,4.2) 40.45,3.5 46.7,3.5 ccw(c46.7,4.2) 47.4,4.2 47.4,4.8 cw(c48.1,4.8) 48.1,5.5 v1(49.5,5.5)
  Bottom Layer w0.5: v1(49.5,5.5) 54.2,5.5 ccw(c54.2,7.3) 56,7.3 cw(c56.7,7.3) 56.7,8 DD11.2
LED_R: DD9.4 R48.2 XP1.11 | length 34.7
  Top Layer w0.5: XP1.11 v1(8.69,12.84) 10.908,12.84 cw(c10.908,10.3) 12.704,12.096 16.556,8.244 ccw(c18.352,10.04) 18.352,7.5 v1(27,7.5)
  Bottom Layer w0.25: R48.2 v1(8.69,12.84)
  Bottom Layer w0.5: v1(27,7.5) 27,8.541 cw(c29.134,8.541) DD9.4
LED_R_mcu: DD3.34 DD9.2 | length 11.3
  Top Layer w0.25: v1(30.5,7.5) 32.031,9.031 cw(c33.827,7.235) 33.827,9.775 DD3.34
  Bottom Layer w0.5: DD9.2 30.8,11 cw(c30.8,10.3) 31.5,10.3 31.5,8.2 cw(c30.8,8.2) 30.8,7.5 v1(30.5,7.5)
NetBQ1_1: BQ1.1 DD1.2 | length 3.3
  Bottom Layer w0.5: BQ1.1 ccw(c22.615,22.88) 22.615,22.265 DD1.2
NetBQ1_2: BQ1.2 DD1.1 | length 3.3
  Bottom Layer w0.5: BQ1.2 cw(c22.615,20.38) 22.615,20.995 DD1.1
NetBQ2_1: BQ2.1 C17.2 DD3.6 | length 6.8
  Top Layer w0.25: v1(40.6,11.8) ccw(c41.125,11.8) 41.125,11.275 DD3.6
  Bottom Layer w0.5: v1(40.6,11.8) ccw(c40.6,12.6) 41.4,12.6 BQ2.1 C17.2
NetBQ2_3: BQ2.3 C16.2 DD3.5 | length 7.4
  Top Layer w0.25: v1(40,10.2) cw(c40.575,10.2) 40.575,10.775 DD3.5
  Bottom Layer w0.5: C16.2 BQ2.3 ccw(c39.2,9.95) 40,9.95 v1(40,10.2)
NetC4_2: C4.2 U1.3 | length 2.4
  Top Layer w0.5: v1(36.6,30.465) U1.3
  Bottom Layer w0.5: v1(36.6,30.465) cw(c37.235,30.465) 37.235,31.1 C4.2
NetC5_2: C5.2 R3.2 R5.1 U1.5 | length 4.5
  Top Layer w0.5: v1(41,29.195) U1.5
  Bottom Layer w0.3: C5.2 ccw(c40.554,29.554) 40.554,29.195 v1(41,29.195) ; R3.2@41,30.3 v1(41,29.195) ; R5.1 v1(41,29.195)
NetDD1_3: DD1.3 GB1.1 | length 9.7
  Bottom Layer w0.5: GB1.1 cw(c22.175,25.6) 22.175,26.075 26.402,26.075 cw(c26.402,25.41) 27.067,25.41 27.067,24.2 cw(c26.402,24.2) 26.402,23.535 DD1.3
NetDD2_7: DD2.7 R9.2 R10.1 | length 3.7
  Top Layer w0.5: DD2.7 v1(56.6,23.535)
  Bottom Layer w0.5: R10.1 54.5,23.535 v1(56.6,23.535)
NetDD3_1: DD3.1 R43.2 | length 3.5
  Top Layer w0.25: v1(44.025,6) DD3.1
  Bottom Layer w0.5: v1(44.025,6) R43.2
NetDD8_1: DD8.1 R52.2 | length 3.9
  Bottom Layer w0.25: R52.2 cw(c23.507,13.107) 21.8,13.107 21.8,14 cw(c22.75,14) 22.75,14.95 DD8.1
NetDD9_1: DD9.1 R53.2 | length 3.9
  Bottom Layer w0.25: R53.2 cw(c31.007,10.107) 29.3,10.107 29.3,11 cw(c30.25,11) 30.25,11.95 DD9.1
NetDD10_1: DD10.1 R54.2 | length 3.9
  Bottom Layer w0.25: R54.2 cw(c23.507,7.107) 21.8,7.107 21.8,8 cw(c22.75,8) 22.75,8.95 DD10.1
NetDD11_1: DD11.1 R55.2 | length 1.3
  Bottom Layer w0.25: DD11.1 57.293,6.882 cw(c56.312,5.9) R55.2
NetDD12_1: DD12.1 R56.2 | length 1.3
  Bottom Layer w0.25: DD12.1 57.293,12.882 cw(c56.312,11.9) R56.2
NetDD13_1: DD13.1 R57.2 | length 1.3
  Bottom Layer w0.25: DD13.1 49.793,9.882 cw(c48.812,8.9) R57.2
NetL1_1: L1.1 R1.2 U1.7 | length 5.5
  Top Layer w0.5: U1.7 L1.1@44,31.735
  Top Layer w1: L1.1 v1(46.6,31.1)
  Bottom Layer w0.8: R1.2 cw(c45.575,31.975) 46.6,31.975 v1(46.6,31.1)
NetL1_2: L1.2 VD1.1 VT1.2 | length 43.3
  Top Layer w1: v1(31.9,41.9) 31.9,30.39 ccw(c34.44,30.39) 34.44,27.85 48.06,27.85 ccw(c48.06,30.39) 50.6,30.39 L1.2 v1(48.5,31.1)
  Bottom Layer w0.8: VD1.1 45.448,36.2 cw(c45.448,33.66) 47.244,35.456 47.756,34.944 cw(c45.96,33.148) 48.5,33.148 v1(48.5,31.1)
  other v1: 27.9,38.9 29.9,38.9 31.9,38.9 33.9,38.9 35.9,38.9 27.9,41.9 29.9,41.9 33.9,41.9 35.9,41.9 27.9,44.9 29.9,44.9 31.9,44.9 33.9,44.9 35.9,44.9
NetR2_1: R2.1 R5.2 | length 1.2
  Bottom Layer w0.5: R5.2 R2.1
NetR4_2: R4.2 U1.2 VD2.1 VT2.2 | length 6.3
  Top Layer w0.5: v1(36.2,31.735) U1.2
  Bottom Layer w0.5: R4.2 34.912,30.017 cw(c35.595,29.334) VD2.1 cw(c35.836,30.541) 35.495,30.541 VT2.2 v1(36.2,31.735)
NetR11_1: R11.1 XP6.1 | length 2.7
  Top Layer w0.5: XP6.1 R11.1
NetR14_1: R14.1 XP6.2 | length 6.1
  Top Layer w0.5: XP6.2 cw(c26.07,3) 26.07,4.5 R14.1
NetR48_1: R48.1 XP5.1 | length 1.8
  Bottom Layer w0.5: XP5.1 R48.1
NetR49_1: R49.1 XP5.2 | length 1.8
  Bottom Layer w0.5: XP5.2 R49.1
NetVD2_2: VD2.2 VT1.1 VT2.3 | length 5.7
  Top Layer w1: VT1.1 v1(30.5,30.915)
  Bottom Layer w0.5: v1(30.5,30.915) ccw(c31.985,32.4) 31.985,30.3 VD2.2 ccw(c33.154,30.541) 33.495,30.541 VT2.3
NRST: C15.2 DD3.7 R30.2 XP5.3 | length 43.8
  Top Layer w0.25: v1(42.6,11.775) DD3.7
  Bottom Layer w0.5: XP5.3 13.77,2.3 ccw(c14.47,2.3) 14.47,1.6 32.7,1.6 ccw(c32.7,2.4) 33.5,2.4 33.5,10.2 cw(c34.3,10.2) 34.3,11 41.825,11 ccw(c41.825,11.775) v1(42.6,11.775) ccw(c43.575,11.775) 43.575,10.8 R30.2 C15.2
RTC_SCL: DD1.6 DD3.21 R6.2 | length 17.9
  Top Layer w0.25: DD3.21 38.75,20.396 cw(c39.604,20.396) 39,21
  Top Layer w0.5: v1(31.2,23.535) 38.05,23.535 cw(c38.05,22.585) 39,22.585 39,21
  Bottom Layer w0.5: DD1.6 v1(31.2,23.535) R6.2
RTC_SDA: DD1.5 DD3.22 R7.2 | length 20.6
  Top Layer w0.25: v1(38,21) cw(c37.396,20.396) 38.25,20.396 DD3.22
  Bottom Layer w0.5: DD1.5 v1(31.2,24.805) ; R7.2 v1(31.2,24.805) ; v1(38,21) 38,25.4 ccw(c37.3,25.4) 37.3,26.1 31.9,26.1 ccw(c31.9,25.4) 31.2,25.4 v1(31.2,24.805)
RTC_SQW: DD1.7 DD3.25 R8.2 | length 14.1
  Top Layer w0.25: 31.2,21 31.2,16.815 ccw(c33.74,16.815) 33.74,14.275 DD3.25
  Top Layer w0.5: 31.2,21 v1(31.2,22.265)
  Bottom Layer w0.5: DD1.7 v1(31.2,22.265) R8.2
T1_a0: DD4.3 XP1.3 | length 5.4
  Top Layer w0.5: DD4.3 v1(7.2,30.77)
  Bottom Layer w0.5: XP1.3 3.758,33.16 cw(c3.758,30.62) 5.554,32.416 v1(7.2,30.77)
T1_a1: DD4.6 XP1.4 | length 6.1
  Top Layer w0.5: DD4.6 v1(7.2,26.96)
  Bottom Layer w0.5: XP1.4 cw(c3.5,30.523) 3.568,30.592 v1(7.2,26.96)
T1_a2: DD4.8 XP1.5 | length 9
  Top Layer w0.5: v1(10.8,25.69) DD4.8
  Bottom Layer w0.5: XP1.5 5.146,26.434 ccw(c6.942,28.23) 6.942,25.69 v1(10.8,25.69)
T1_a3: DD4.11 XP1.6 | length 14
  Top Layer w0.5: v1(10.8,29.5) DD4.11
  Bottom Layer w0.5: XP1.6 ccw(c5.287,27.327) 5.287,24.8 10.8,24.8 ccw(c10.8,25.6) 11.6,25.6 11.6,28.7 ccw(c10.8,28.7) v1(10.8,29.5)
T1_MCU_a0: DD3.29 DD4.2 R12.1 R15.2 | length 44.3
  Top Layer w0.25: 30.5,12.5 ccw(c31.043,13.043) 31.043,12.275 DD3.29
  Top Layer w0.5: DD4.2 8.96,32.04 cw(c8.96,31.1) 9.9,31.1 9.9,25.7 ccw(c10.8,25.7) 10.8,24.8 v1(12.5,24.8) ; v1(14.5,23.2) 14.5,22.052 ccw(c17.04,22.052) 15.244,20.256 19.435,16.065 ccw(c21.231,17.861) 21.231,15.321 23.327,15.321 cw(c23.327,12.781) 25.123,14.577 26.456,13.244 ccw(c28.252,15.04) 28.252,12.5 30.5,12.5
  Bottom Layer w0.5: v1(12.5,24.8) 12.5,23.9 ccw(c13.2,23.9) 13.2,23.2 v1(14.5,23.2) ; R15.2 v1(14.5,23.2) ; R12.1 v1(14.5,23.2)
T1_MCU_a1: DD3.28 DD4.5 R17.1 R19.2 | length 39.7
  Top Layer w0.25: 30.5,13.5 ccw(c32.25,15.25) 32.25,12.775 DD3.28
  Top Layer w0.5: DD4.5 7.97,28.23 cw(c7.97,27.2) 9,27.2 9,25.7 ccw(c10.7,25.7) 10.7,24 14.9,24 cw(c14.9,23.3) 15.6,23.3 v1(15.6,23.2) 15.6,22.404 ccw(c18.14,22.404) 16.344,20.608 20.007,16.945 ccw(c21.7,18.638) 21.7,16.244 23.804,16.244 cw(c23.804,13.704) 25.6,15.5 26.856,14.244 ccw(c28.652,16.04) 28.652,13.5 30.5,13.5
  Bottom Layer w0.5: R19.2 v1(15.6,23.2) R17.1
T1_MCU_a2: DD3.27 DD4.9 R21.1 R23.2 | length 33
  Top Layer w0.25: 30.5,14.5 30.981,14.019 ccw(c32.777,15.815) 32.777,13.275 DD3.27
  Top Layer w0.5: DD4.9 15.089,26.96 cw(c15.089,25.389) 16.2,26.5 cw(c14.993,25.293) 16.7,25.293 v1(16.7,23.2) ccw(c18.39,23.2) 17.195,22.005 17.756,21.444 ccw(c19.552,23.24) 19.552,20.7 20.748,20.7 cw(c20.748,18.16) 22.544,19.956 27.256,15.244 ccw(c29.052,17.04) 29.052,14.5 30.5,14.5
  Bottom Layer w0.5: R23.2 v1(16.7,23.2) R21.1
T1_MCU_a3: DD3.26 DD4.12 R25.1 R27.2 | length 34.5
  Top Layer w0.25: 30.5,15.5 31.481,14.519 ccw(c33.277,16.315) 33.277,13.775 DD3.26
  Top Layer w0.5: DD4.12 12.478,30.77 cw(c12.478,28.23) 14.274,30.026 17.1,27.2 cw(c15.41,25.51) 17.8,25.51 v1(17.8,23.2) ccw(c18.766,23.2) 18.083,22.517 18.5,22.1 ccw(c19.466,23.066) 19.466,21.7 21.304,21.7 cw(c21.304,19.16) 23.1,20.956 27.812,16.244 ccw(c29.608,18.04) 29.608,15.5 30.5,15.5
  Bottom Layer w0.5: R27.2 v1(17.8,23.2) R25.1
T2_a0: DD5.3 XP1.7 | length 5.5
  Top Layer w0.5: DD5.3 v1(7.2,20.57)
  Bottom Layer w0.5: XP1.7 3.718,23 cw(c3.718,20.46) 5.514,22.256 v1(7.2,20.57)
T2_a1: DD5.6 XP1.8 | length 6.1
  Top Layer w0.5: DD5.6 v1(7.2,16.76)
  Bottom Layer w0.5: XP1.8 cw(c3.5,20.363) 3.568,20.432 ccw(c3.665,20.432) 3.596,20.364 v1(7.2,16.76)
T2_a2: DD5.8 XP1.9 | length 9.1
  Top Layer w0.5: v1(10.8,15.49) DD5.8
  Bottom Layer w0.5: XP1.9 5.186,16.234 ccw(c6.982,18.03) 6.982,15.49 v1(10.8,15.49)
T2_a3: DD5.11 XP1.10 | length 14
  Top Layer w0.5: v1(10.8,19.3) DD5.11
  Bottom Layer w0.5: XP1.10 3.536,15.344 ccw(c5.332,17.14) 5.332,14.6 10.8,14.6 ccw(c10.8,15.4) 11.6,15.4 11.6,18.5 ccw(c10.8,18.5) v1(10.8,19.3)
T2_MCU_a0: DD3.33 DD5.2 R13.1 R16.2 | length 42
  Top Layer w0.25: 30.5,8.5 31.531,9.531 cw(c33.327,7.735) 33.327,10.275 DD3.33
  Top Layer w0.5: DD5.2 8.96,21.84 cw(c8.96,20.9) 9.9,20.9 9.9,15.5 ccw(c10.8,15.5) 10.8,14.6 v1(12.5,14.6) ; v1(14.5,13) 14.5,12.752 ccw(c17.04,12.752) 15.244,10.956 16.956,9.244 ccw(c18.752,11.04) 18.752,8.5 30.5,8.5
  Bottom Layer w0.5: v1(12.5,14.6) 12.5,13.7 ccw(c13.2,13.7) 13.2,13 v1(14.5,13) ; R16.2 v1(14.5,13) ; R13.1 v1(14.5,13)
T2_MCU_a1: DD3.32 DD5.5 R18.1 R20.2 | length 37
  Top Layer w0.25: 30.5,9.5 31.031,10.031 cw(c32.827,8.235) 32.827,10.775 DD3.32
  Top Layer w0.5: DD5.5 7.97,18.03 cw(c7.97,17) 9,17 9,15.5 ccw(c10.7,15.5) 10.7,13.8 14.9,13.8 cw(c14.9,13.1) 15.6,13.1 v1(15.6,13) ccw(c18.014,13) 16.307,11.293 17.356,10.244 ccw(c19.152,12.04) 19.152,9.5 30.5,9.5
  Bottom Layer w0.5: R20.2 v1(15.6,13) R18.1
T2_MCU_a2: DD3.31 DD5.9 R22.1 R24.2 | length 30.4
  Top Layer w0.25: 30.5,10.5 30.531,10.531 cw(c32.327,8.735) 32.327,11.275 DD3.31
  Top Layer w0.5: DD5.9 15.089,16.76 cw(c15.089,15.189) 16.2,16.3 cw(c14.993,15.093) 16.7,15.093 v1(16.7,13) ccw(c18.39,13) 17.195,11.805 17.756,11.244 ccw(c19.552,13.04) 19.552,10.5 22.8,10.5 30.5,10.5
  Bottom Layer w0.5: R24.2 v1(16.7,13) R22.1
T2_MCU_a3: DD3.30 DD5.12 R26.1 R28.2 | length 31.6
  Top Layer w0.25: 30.5,11.5 cw(c31.164,10.836) 31.164,11.775 DD3.30
  Top Layer w0.5: DD5.12 12.478,20.57 cw(c12.478,18.03) 14.274,19.826 17.1,17 cw(c15.41,15.31) 17.8,15.31 v1(17.8,13) ccw(c18.766,13) 18.083,12.317 18.5,11.9 ccw(c19.466,12.866) 19.466,11.5 30.5,11.5
  Bottom Layer w0.5: R28.2 v1(17.8,13) R26.1
T3_a0: DD6.3 XP3.7 | length 9.1
  Top Layer w0.5: DD6.3 v1(69.2,20.57)
  Bottom Layer w0.5: v1(69.2,20.57) 70.886,22.256 cw(c72.682,20.46) 72.682,23 XP3.7
T3_a1: DD6.6 XP3.8 | length 10.1
  Top Layer w0.5: DD6.6 v1(69.2,16.76)
  Bottom Layer w0.5: v1(69.2,16.76) cw(c71.711,16.76) 69.935,18.535 71.116,19.716 cw(c72.912,17.92) 72.912,20.46 XP3.8
T3_a2: DD6.8 XP3.9 | length 5.5
  Top Layer w0.5: v1(72.8,15.49) DD6.8
  Bottom Layer w0.5: v1(72.8,15.49) 74.486,17.176 cw(c76.282,15.38) 76.282,17.92 XP3.9
T3_a3: DD6.11 XP3.10 | length 10.1
  Top Layer w0.5: v1(72.8,19.3) DD6.11
  Bottom Layer w0.5: v1(72.8,19.3) ccw(c72.8,18.6) 72.1,18.6 72.1,15.4 ccw(c72.8,15.4) 72.8,14.7 74.858,14.7 ccw(c74.858,17.022) XP3.10
T3_MCU_a0: DD3.4 DD6.2 R31.1 R33.2 | length 32.5
  Top Layer w0.25: DD3.4 47.223,10.275 ccw(c47.223,12.815) 49.019,11.019 49.5,11.5
  Top Layer w0.5: 49.5,11.5 60.534,11.5 ccw(c60.534,12.866) 61.5,11.9 61.917,12.317 ccw(c61.234,13) v1(62.2,13) 62.2,15.248 cw(c64.74,15.248) 62.944,17.044 67.316,21.416 cw(c68.34,20.391) DD6.2
  Bottom Layer w0.5: R33.2 v1(62.2,13) R31.1
T3_MCU_a1: DD3.3 DD6.5 R35.1 R37.2 | length 30.9
  Top Layer w0.25: DD3.3 47.75,9.775 ccw(c47.75,12.25) 49.5,10.5
  Top Layer w0.5: 49.5,10.5 60.448,10.5 ccw(c60.448,13.04) 62.244,11.244 62.805,11.805 ccw(c61.61,13) v1(63.3,13) 63.3,15.093 cw(c65.007,15.093) 63.8,16.3 64.786,17.286 cw(c66.582,15.49) 66.582,18.03 DD6.5
  Bottom Layer w0.5: R37.2 v1(63.3,13) R35.1
T3_MCU_a2: DD3.2 DD6.9 R39.1 R41.2 | length 35.5
  Top Layer w0.25: DD3.2 48.957,9.275 ccw(c48.957,10.043) 49.5,9.5
  Top Layer w0.5: 49.5,9.5 60.848,9.5 ccw(c60.848,12.04) 62.644,10.244 63.693,11.293 ccw(c61.986,13) v1(64.4,13) 64.4,13.1 cw(c65.1,13.1) 65.1,13.8 69.58,13.8 ; 69.8,13.8 69.58,13.8 ; DD6.9 72.54,16.76 ccw(c72.54,15.92) 71.7,15.92 cw(c69.58,15.92) 69.58,13.8
  Bottom Layer w0.5: R41.2 v1(64.4,13) R39.1
T3_MCU_a3: DD3.46 DD6.12 R44.1 R46.2 | length 47.4
  Top Layer w0.25: DD3.46 41.75,5.7 ccw(c42.45,5.7) 42.45,5 45.2,5 ccw(c45.2,5.7) 45.9,5.7 45.9,7.8 cw(c46.6,7.8) 46.6,8.5 49.5,8.5
  Top Layer w0.5: 49.5,8.5 61.248,8.5 ccw(c61.248,11.04) 63.044,9.244 64.756,10.956 ccw(c62.96,12.752) 65.5,12.752 v1(65.5,13) ; v1(67.5,14.6) 69.58,14.6 ccw(c69.58,15.92) 70.9,15.92 70.9,19.87 cw(c71.6,19.87) 71.6,20.57 DD6.12
  Bottom Layer w0.5: R46.2 v1(65.5,13) ; R44.1 v1(65.5,13) ; v1(67.5,14.6) 67.5,13.7 cw(c66.8,13.7) 66.8,13 v1(65.5,13)
T4_a0: DD7.3 XP3.3 | length 9
  Top Layer w0.5: DD7.3 v1(69.2,30.77)
  Bottom Layer w0.5: v1(69.2,30.77) 70.846,32.416 cw(c72.642,30.62) 72.642,33.16 XP3.3
T4_a1: DD7.6 XP3.4 | length 10.1
  Top Layer w0.5: DD7.6 v1(69.2,26.96)
  Bottom Layer w0.5: v1(69.2,26.96) cw(c71.711,26.96) 69.935,28.735 71.4,30.2 cw(c72.414,29.186) 72.414,30.62 XP3.4
T4_a2: DD7.8 XP3.5 | length 5.4
  Top Layer w0.5: v1(72.8,25.69) DD7.8
  Bottom Layer w0.5: v1(72.8,25.69) 74.446,27.336 cw(c76.242,25.54) 76.242,28.08 XP3.5
T4_a3: DD7.11 XP3.6 | length 10.1
  Top Layer w0.5: v1(72.8,29.5) DD7.11
  Bottom Layer w0.5: v1(72.8,29.5) ccw(c72.8,28.8) 72.1,28.8 72.1,25.6 ccw(c72.8,25.6) 72.8,24.9 74.955,24.9 ccw(c74.955,27.085) XP3.6
T4_MCU_a0: DD3.13 DD7.2 R32.1 R34.2 | length 39.3
  Top Layer w0.25: DD3.13 42.75,16.8 cw(c43.45,16.8) 43.45,17.5 45.7,17.5 cw(c45.7,16.8) 46.4,16.8 46.4,16.2 ccw(c47.1,16.2) 47.1,15.5 49.5,15.5
  Top Layer w0.5: 49.5,15.5 54.648,15.5 ccw(c54.648,18.04) 56.444,16.244 61.456,21.256 ccw(c59.66,23.052) 62.2,23.052 v1(62.2,23.2) 62.2,25.448 cw(c64.74,25.448) 62.944,27.244 67.316,31.616 cw(c68.34,30.591) DD7.2
  Bottom Layer w0.5: R34.2 v1(62.2,23.2) R32.1
T4_MCU_a1: DD3.12 DD7.5 R36.1 R38.2 | length 33.8
  Top Layer w0.25: DD3.12 48.957,14.275 ccw(c48.957,15.043) 49.5,14.5
  Top Layer w0.5: 49.5,14.5 55.048,14.5 ccw(c55.048,17.04) 56.844,15.244 62.556,20.956 ccw(c60.76,22.752) 63.3,22.752 v1(63.3,23.2) 63.3,25.293 cw(c65.007,25.293) 63.8,26.5 64.786,27.486 cw(c66.582,25.69) 66.582,28.23 DD7.5
  Bottom Layer w0.5: R38.2 v1(63.3,23.2) R36.1
T4_MCU_a2: DD3.11 DD7.9 R40.1 R42.2 | length 38.6
  Top Layer w0.25: DD3.11 48.836,13.775 cw(c48.836,12.836) 49.5,13.5
  Top Layer w0.5: 49.5,13.5 55.496,13.5 ccw(c55.496,16.04) 57.292,14.244 63.656,20.608 ccw(c61.86,22.404) 64.4,22.404 v1(64.4,23.2) 64.4,23.3 cw(c65.1,23.3) 65.1,24 69.58,24 ; 69.8,24 69.58,24 ; DD7.9 72.54,26.96 ccw(c72.54,26.12) 71.7,26.12 cw(c69.58,26.12) 69.58,24
  Bottom Layer w0.5: R42.2 v1(64.4,23.2) R40.1
T4_MCU_a3: DD3.10 DD7.12 R45.1 R47.2 | length 43.4
  Top Layer w0.25: DD3.10 47.673,13.275 cw(c47.673,10.735) 49.469,12.531 49.5,12.5
  Top Layer w0.5: 49.5,12.5 55.948,12.5 ccw(c55.948,15.04) 57.744,13.244 64.756,20.256 ccw(c62.96,22.052) 65.5,22.052 v1(65.5,23.2) ; v1(67.5,24.8) 69.58,24.8 ccw(c69.58,26.12) 70.9,26.12 70.9,30.07 cw(c71.6,30.07) 71.6,30.77 DD7.12
  Bottom Layer w0.5: R47.2 v1(65.5,23.2) ; R45.1 v1(65.5,23.2) ; v1(67.5,24.8) 67.5,23.9 cw(c66.8,23.9) 66.8,23.2 v1(65.5,23.2)
pads on no net: BQ2.2 BQ2.4 DD3.18 DD3.19 DD3.20

## Polygon pours and split planes (outlines as drawn)
GND on Bottom Layer "Bottom Layer-GND" (solid, remove dead copper, pour order 8): 0.5,0.5 79.5,0.5 79.5,45.5 0.5,45.5
+3.3 on Top Layer "Bottom Layer-GND" (solid, remove dead copper, pour order 12): 0.5,0.5 79.5,0.5 79.5,28.356 0.5,28.356

## Other copper
Bottom Layer:
  rectangle net NetL1_2: 26.4,37.9 37.4,45.9

## Silkscreen, mask and mechanical layers (free items; w line width, h text height)
Top Overlay:
  text "GND" at 39,43.3 h1.5
  text "+180V" at 38.4,36.7 h1.5
  text "NRST" at 14.2,4.7 h1.5 r90
  text "GND" at 16.8,4.7 h1.5 r90
  text "+3.3V" at 19.98,4.7 h1.5 r90
  text "+3.3V" at 22.52,4.7 h1.5 r90
  text "But1" at 25.06,4.7 h1.5 r90
  text "But0" at 27.6,4.7 h1.5 r90
  text "SWDIO" at 9.2,4.6 h1.5 r90
  text "SWCLK" at 11.7,4.6 h1.5 r90
Template:
  the board outline again, w0.2